# EAGLE board mono main V2-5 (EAGLE 7.4.0)
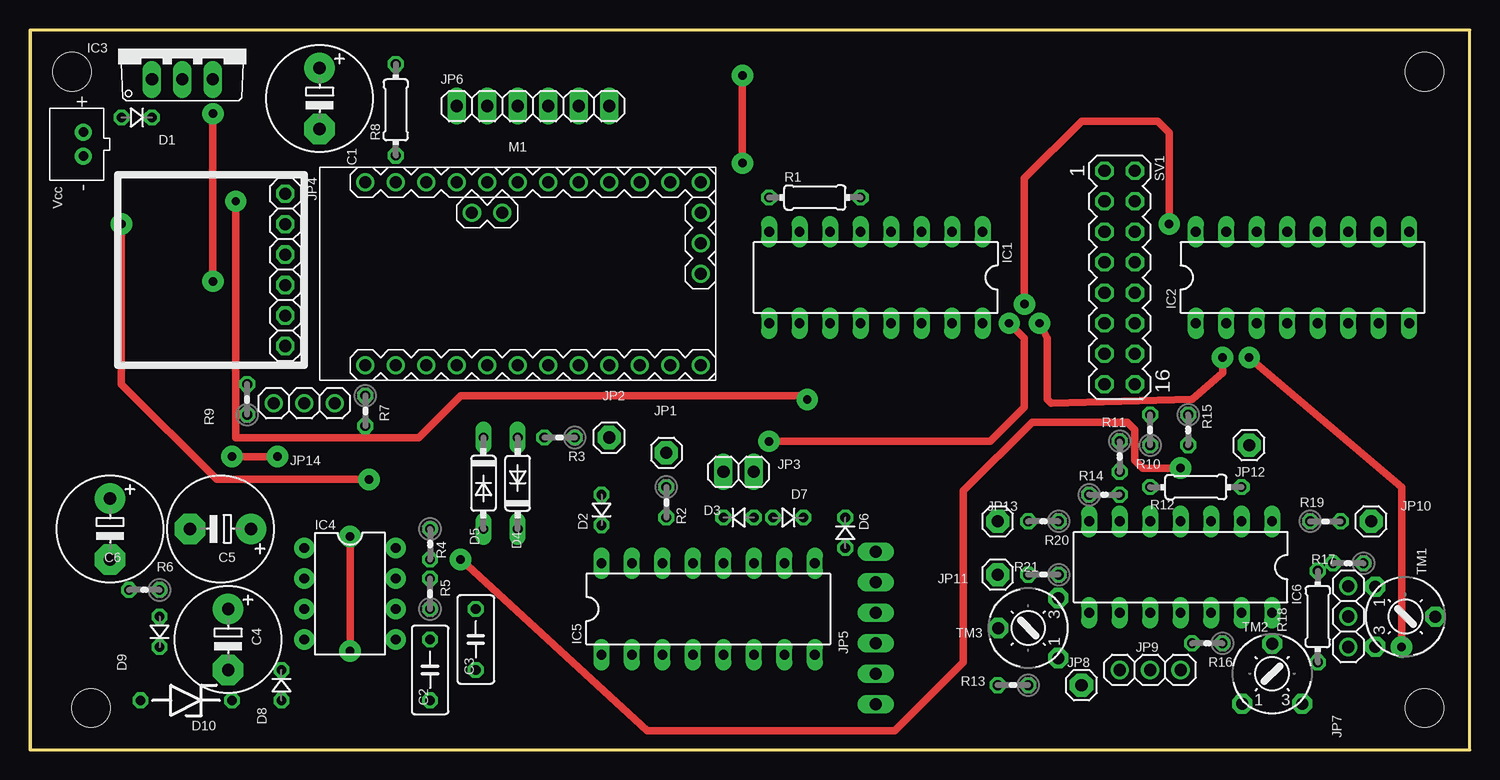
[diagram p0: board, top side]
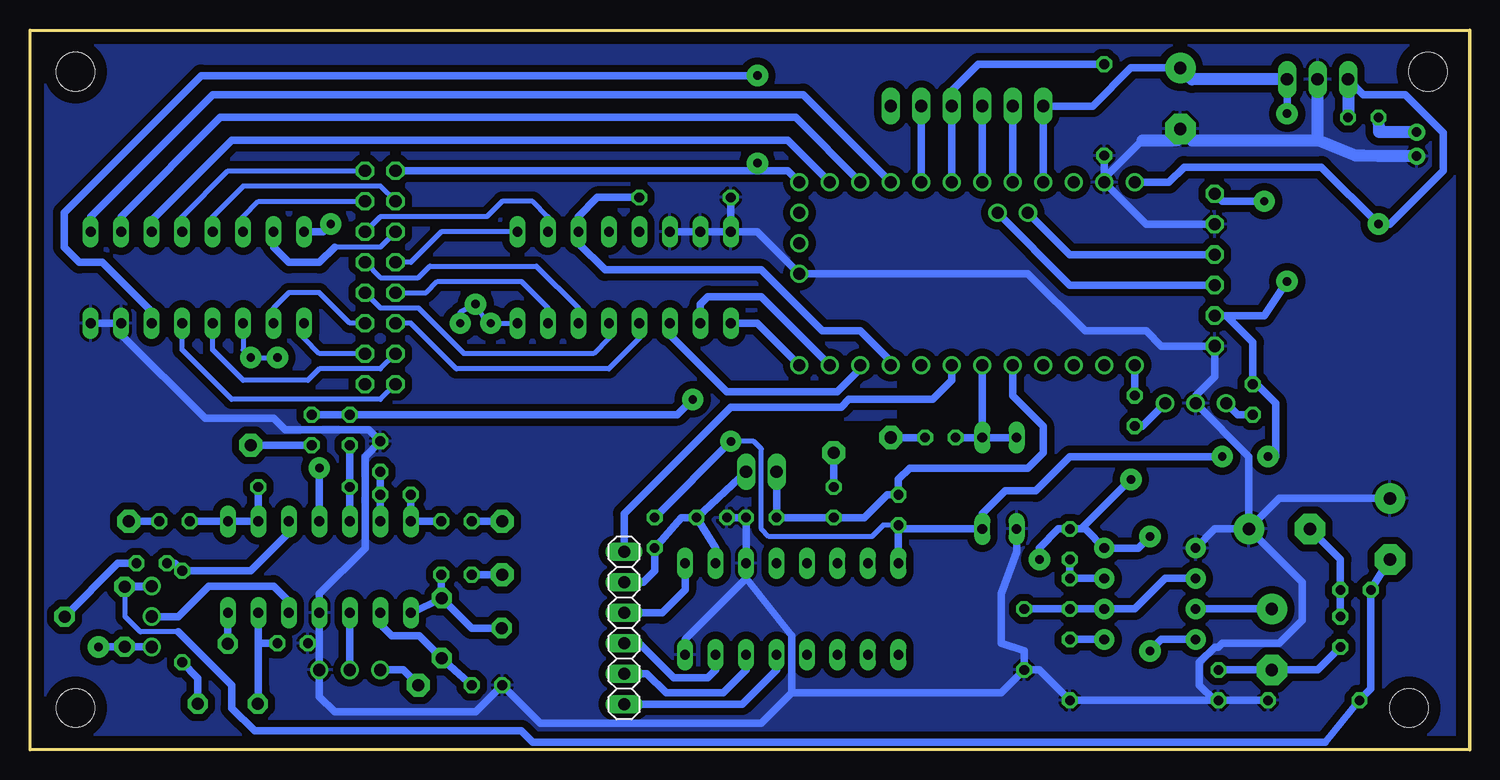
[diagram p1: board, bottom side, seen from below]

Size 120 x 59.99 mm. Coordinates in mm from the lower left corner, seen from the top.
Outline: 0,0 120,0 120,59.99 0,59.99 0,0
Copper layers (1*16): Top 0.035mm / dielectric 1.5mm / Bottom 0.035mm
Design rules "default": minimum track width 10mil, minimum drill 24mil, track to track 8mil, track to pad 8mil, pad to pad 8mil, via to via 8mil, smd to smd 8mil, copper to edge 40mil, drill to drill 8mil, minimum pad ring 10mil, minimum via ring 8mil, stop-mask expansion 4mil, vias tented up to drill 0mil, thermal gap 10mil
Holes 3.2 mm at 3.49,56.52 5.08,3.49 116.2,56.52 116.2,3.49

## Footprints (pad centres in the part's own frame; a part is rotated, then mirrored left to right if it is on the bottom)
E5-8,5 = drill 1.016 pad 2.54: + -2.54,0 | drill 1.016 pad 2.54 octagon: - 2.54,0
C050-030X075 = drill 0.813 octagon: 1 -2.54,0; 2 2.54,0
JST-PH-2-THM = drill 0.8 pad 1.422: 1 1,0; 2 -1,0
D-2.5 = drill 0.813 octagon: A 1.27,0; C -1.27,0
DO35-7 = drill 0.813 long: A 3.81,0; C -3.81,0
ZDIO-7.5 = drill 0.813 octagon: A 3.81,0; C -3.81,0
DIL16 = drill 0.813 long: 1 -8.89,-3.81; 2 -6.35,-3.81; 3 -3.81,-3.81; 4 -1.27,-3.81; 5 1.27,-3.81; 6 3.81,-3.81; 7 6.35,-3.81; 8 8.89,-3.81; 9 8.89,3.81; 10 6.35,3.81; 11 3.81,3.81; 12 1.27,3.81; 13 -1.27,3.81; 14 -3.81,3.81; 15 -6.35,3.81; 16 -8.89,3.81
TO220V = drill 1.016 long: 1 -2.54,-2.54; 2 0,-2.54; 3 2.54,-2.54
DIL08-ROUND = drill 0.813 pad 1.676: 1 -3.81,-3.81; 2 -1.27,-3.81; 3 1.27,-3.81; 4 3.81,-3.81; 5 3.81,3.81; 6 1.27,3.81; 7 -1.27,3.81; 8 -3.81,3.81
DIL14 = drill 0.813 long: 1 -7.62,-3.81; 2 -5.08,-3.81; 3 -2.54,-3.81; 4 0,-3.81; 5 2.54,-3.81; 6 5.08,-3.81; 7 7.62,-3.81; 8 7.62,3.81; 9 5.08,3.81; 10 2.54,3.81; 11 0,3.81; 12 -2.54,3.81; 13 -5.08,3.81; 14 -7.62,3.81
1X01 = drill 1.016 pad 1.93 octagon: 1 0,0
1X02 = drill 1.016 long: 1 -1.27,0; 2 1.27,0
1X06 = drill 1.016 octagon: 1 -6.35,0; 2 -3.81,0; 3 -1.27,0; 4 1.27,0; 5 3.81,0; 6 6.35,0
1X06' = drill 1.016 long: 1 -6.35,0; 2 -3.81,0; 3 -1.27,0; 4 1.27,0; 5 3.81,0; 6 6.35,0
1X03 = drill 1.016: 1 -2.54,0; 2 0,0; 3 2.54,0
ARDUINO-PRO-MINI#NP = drill 1: J2.1 -1.27,5.08; J2.2 -3.81,5.08; J3.1 15.24,0; J3.2 15.24,2.54; J3.3 15.24,5.08; J6.1 -12.7,7.62; J6.2 -10.16,7.62; J6.3 -7.62,7.62; J6.4 -5.08,7.62; J6.5 -2.54,7.62; J6.6 0,7.62; J6.7 2.54,7.62; J6.8 5.08,7.62; J6.9 7.62,7.62; J6.10 10.16,7.62; J6.11 12.7,7.62; J6.12 15.24,7.62; J7.1 15.24,-7.62; J7.2 12.7,-7.62; J7.3 10.16,-7.62; J7.4 7.62,-7.62; J7.5 5.08,-7.62; J7.6 2.54,-7.62; J7.7 0,-7.62; J7.8 -2.54,-7.62; J7.9 -5.08,-7.62; J7.10 -7.62,-7.62; J7.11 -10.16,-7.62; J7.12 -12.7,-7.62
0204/7 = drill 0.813 octagon: 1 -3.81,0; 2 3.81,0
0204V = drill 0.813 octagon: 1 -1.27,0; 2 1.27,0
MA08-2 = drill 1.016 octagon: 1 -8.89,-1.27; 2 -8.89,1.27; 3 -6.35,-1.27; 4 -6.35,1.27; 5 -3.81,-1.27; 6 -3.81,1.27; 7 -1.27,-1.27; 8 -1.27,1.27; 9 1.27,-1.27; 10 1.27,1.27; 11 3.81,-1.27; 12 3.81,1.27; 13 6.35,-1.27; 14 6.35,1.27; 15 8.89,-1.27; 16 8.89,1.27
6MM = drill 1 pad 1.676 octagon: A -2.5,-2.5; E 2.5,-2.5; S 0,2.5

## Placement (x,y rotation side)
C1  [E5-8,5]  24.13,54.29 270 top
C2  [C050-030X075]  33.34,6.67 270 top
C3  [C050-030X075]  37.15,9.21 270 top
C4  47u  [E5-8,5]  16.51,9.21 270 top
C5  47  [E5-8,5]  15.88,18.41 180 top
C6  [E5-8,5]  6.67,18.41 270 top
CN1  Vcc  [JST-PH-2-THM]  4.45,50.48 90 top
D1  4148  [D-2.5]  8.89,52.7 180 top
D2  1N4148  [D-2.5]  47.62,20 90 top
D3  1N4148  [D-2.5]  59.05,19.37 0 top
D4  1N4148  [DO35-7]  40.64,22.23 90 top
D5  1N4148  [DO35-7]  37.78,22.23 270 top
D6  1N4148  [D-2.5]  67.94,18.1 270 top
D7  1N4148  [D-2.5]  63.18,19.37 180 top
D8  4148  [D-2.5]  20.95,5.4 270 top
D9  1N4148  [D-2.5]  10.79,9.84 90 top
D10  [ZDIO-7.5]  13.02,4.13 180 top
IC1  4051N  [DIL16]  70.48,39.37 180 top
IC2  4051N  [DIL16]  106.05,39.37 0 top
IC3  7805  [TO220V]  12.7,58.42 0 top
IC4  NE555N  [DIL08-ROUND]  26.67,13.02 270 top
IC5  4040N  [DIL16]  56.52,11.75 0 top
IC6  TL084P  [DIL14]  95.89,15.24 180 top
JP1  CK_O  [1X01]  53.02,24.77 0 top
JP2  GATE  [1X01]  48.26,26.04 90 top
JP3  CK_OUT  [1X02]  59.05,23.18 180 top
JP4  DAC  [1X06]  21.27,40.01 270 top
JP5  CK_ division_rotor  [1X06']  70.48,10.16 270 bottom
JP6  [1X06']  41.91,53.66 0 top
JP7  pitch_bend  [1X03]  109.86,11.11 270 top
JP8  Exp_IN  [1X01]  87.63,5.4 180 top
JP9  expression  [1X03]  93.34,6.67 180 top
JP10  Bend  [1X01]  111.76,19.05 180 top
JP11  Exp_out  [1X01]  80.64,14.61 180 top
JP12  CV  [1X01]  101.6,25.4 180 top
JP13  CV_Bend  [1X01]  80.64,19.05 180 top
JP14  MIDI_PORT  [1X03]  22.86,28.89 180 top
M1  ARDUINO-PRO-MINI-5.0V  [ARDUINO-PRO-MINI#NP]  40.64,39.69 0 top
R1  10k  [0204/7]  65.41,46.04 0 top
R2  330  [0204V]  53.02,20.64 270 top
R3  300  [0204V]  44.13,26.04 180 top
R4  10k  [0204V]  33.34,17.14 270 top
R5  10k  [0204V]  33.34,13.02 90 top
R6  470  [0204V]  9.53,13.34 180 top
R7  330  [0204V]  27.94,28.26 270 top
R8  1k  [0204/7]  30.48,53.34 90 top
R9  330  [0204V]  18.1,29.21 90 top
R10  10k  [0204V]  93.34,26.67 90 top
R11  10k  [0204V]  90.81,24.45 270 top
R12  10k  [0204/7]  97.16,21.91 0 top
R13  10k  [0204V]  81.92,5.4 180 top
R14  10k  [0204V]  89.53,21.27 0 top
R15  100  [0204V]  96.52,26.67 270 top
R16  10k  [0204V]  98.11,8.89 180 top
R17  47k  [0204V]  109.86,15.56 180 top
R18  47k  [0204/7]  107.31,11.11 90 top
R19  100  [0204V]  107.95,19.05 0 top
R20  100  [0204V]  84.45,19.05 180 top
R21  100  [0204V]  84.45,14.61 180 top
SV1  keyboard connector  [MA08-2]  90.81,39.37 270 top
TM1  10k-BEND_OFF  [6MM]  114.62,11.11 270 top
TM2  50k-B_GAIN  [6MM]  103.5,6.35 0 top
TM3  50k-EXP_GAIN  [6MM]  83.19,10.16 90 top

## Library data of the parts
C1-C6 R1-R11 R13-R21 = rcl
CN1 IC4 JP1 JP2 JP4 JP7-JP14 TM1-TM3 = adafruit
D1-D10 = diode
IC1 IC2 IC5 = 40xx
IC3 IC6 = linear
JP3 JP5 JP6 = pinhead
M1 = diy-modules
R12 = eagle-ltspice; SPICEMODEL: NONE; SPICEPREFIX: R
SV1 = con-lstb; OC_FARNELL: unknown; OC_NEWARK: unknown

## Nets
-3V: C6.- D10.A JP7.1 R6.2 TM1.A
AGND: C1.- C2.2 C3.2 C5.+ C6.+ CN1.2 D3.A D5.A D7.A D8.A D10.C IC1.6 IC1.7 IC1.8 IC2.7 IC2.8 IC3.2 IC4.1 IC5.8 IC5.11 IC6.11 JP4.2 JP4.6 JP9.1 JP14.2 M1.J6.2 R1.1 R8.1 R11.1 R13.2 R16.2
ARP_ENABLE: JP6.4 M1.J6.7 R8.2
ARP_MODE: JP6.5 M1.J6.8
CK_I: JP5.1 M1.J7.6
CK_O: D2.A D3.C JP3.2 M1.J7.8 R2.2
CK_RATE: JP6.3 M1.J6.6
CV: JP4.1 R10.2 R15.1
GATE: D4.A D5.C M1.J7.7 R3.2
GND: JP6.6
GND.1: M1.J7.9
MIDI_O: M1.J7.12 R7.1
N$1: IC6.14 TM2.S
N$2: R17.1 TM1.S
N$3: R18.1 TM2.E
N$4: IC6.3 R17.2 R18.2
N$5: IC6.1 IC6.2 R12.2 R19.1
N$6: JP10.1 R19.2
N$7: JP13.1 R20.2
N$8: JP11.1 R21.2
N$15: JP12.1 R15.2
N$16: JP1.1 R2.1
N$22: IC5.9 JP5.3
N$23: IC5.7 JP5.4
N$24: IC5.6 JP5.5
N$25: IC5.5 JP5.6
N$26: D6.A D7.C IC5.10 JP3.1 JP5.2
N$28: JP2.1 R3.1
N$30: JP14.1 R7.2
N$31: JP14.3 R9.1
N$33: IC6.9 R13.1 TM3.A
N$40: IC4.7 R4.2 R5.2
N$41: C3.1 IC4.2 IC4.6 R5.1
N$42: C2.1 IC4.5
N$44: C4.+ IC4.3
N$45: C4.- D8.C D9.C
N$46: C5.- D9.A R6.1
N$48: IC6.12 JP7.2
N$49: IC6.13 R16.1 TM2.A
N$51: IC6.10 JP9.2
N$52: IC6.8 R21.1 TM3.E TM3.S
N$53: CN1.1 D1.A
N$55: IC6.6 R11.2 R14.2
N$56: IC6.7 R14.1 R20.1
N$60: IC6.5 R10.1 R12.1
N$61: JP8.1 JP9.3
NC: SV1.16
OCT_SEL: JP6.2 M1.J6.5
R1: IC1.2 SV1.6
R2: IC1.1 SV1.7
R3: IC1.14 SV1.8
R4: IC1.15 SV1.9
R5: IC1.13 SV1.10
R6: IC1.12 SV1.11
R_MUX: IC1.3 M1.J7.4 R1.2
R_MUX_A: IC1.11 M1.J7.3
R_MUX_B: IC1.10 M1.J7.2
R_MUX_C: IC1.9 M1.J7.1
SCK: JP4.3 M1.J2.2
SDA: JP4.4 M1.J2.1
VCC: C1.+ D2.C D4.C D6.C IC1.16 IC2.3 IC2.16 IC3.3 IC5.16 JP4.5 JP6.1 JP7.3 M1.J6.4 R9.2 TM1.E
VCC_RAW: D1.C IC3.1 IC4.4 IC4.8 IC6.4 M1.J6.1 R4.1
W1: IC2.6 M1.J6.12 SV1.1
W2: IC2.12 SV1.2
W3: IC2.13 SV1.3
W4: IC2.14 SV1.4
W5: IC2.15 SV1.5
W6: IC2.2 SV1.12
W7: IC2.4 SV1.13
W8: IC2.1 SV1.14
W9: IC2.5 SV1.15
W_MUX: M1.J7.5
W_MUX_A: IC2.11 M1.J6.11
W_MUX_B: IC2.10 M1.J6.10
W_MUX_C: IC2.9 M1.J6.9

## Tracks (layer width: path | path; a pad name or v marks a point on that pad's centre or on a via)
-3V
  Bottom 0.406: 107.63,9.84 110.81,9.84 112.08,11.11 112.08,13.57
  Bottom 0.61: C6.- R6.2 8.26,5.08 D10.A 12.06,0.64 78.11,0.64 79.06,1.59 101.28,1.59 103.19,3.49 103.19,5.4 107.63,9.84 | 112.39,13.65 JP7.1 109.89,13.61 TM1.A 112.08,13.57
AGND
  Bottom 0.61: IC2.8 IC2.7 112.39,34.61 105.41,27.62 99.69,27.62 98.74,26.67 91.76,26.67 R11.1 92.08,24.45 92.08,16.83 95.89,13.02 IC6.11 95.89,8.89 | IC1.6 IC1.7 IC1.8 | C3.2 35.88,6.67 C2.2 D8.A | IC1.8 59.37,43.18 55.88,39.69 36.83,39.69 32.07,34.92 26.99,34.92 25.72,33.66 JP4.6 21.27,31.11 22.86,29.53 JP14.2 18.41,24.45 C5.+ | M1.J6.2 30.48,47.62 27.3,50.8 | M1.J6.2 26.99,43.81 JP4.2 | R1.1 IC1.8 | D7.A D3.A IC5.11 60.33,14.29 | 95.89,8.89 JP9.1 95.89,4.45 94.61,3.17 82.87,3.17 R13.2 77.47,2.22 59.05,2.22 56.52,4.76 | 95.89,8.89 R16.2 | R8.1 M1.J6.2 | D10.C D8.A | C3.2 39.05,4.76 56.52,4.76 | C3.2 37.15,8.26 39.05,8.89 39.05,13.02 37.78,16.51 D5.A | 60.33,14.29 65.41,9.21 IC5.8 | 56.52,4.76 56.52,9.53 60.33,14.29 | C6.+ 15.88,20.95 C5.+ | C5.+ 21.27,18.41 IC4.1 | D8.A 21.27,4.13 22.54,5.4 22.54,7.3 21.27,8.57 20.95,8.57 20.64,8.89 15.88,8.89 13.97,10.79 13.97,13.97 C5.+
  Bottom 1.016: CN1.2 7.67,49.48 8.89,49.53 9.53,49.53 12.7,50.8 | 12.7,50.8 IC3.2 | 12.7,50.8 23.18,50.8 C1.- 24.13,51.12 24.45,50.8 27.3,50.8
  pour Bottom (isolate 0.61): 0,60.01 120.02,60.01 120.02,0 0,0
ARP_ENABLE
  Bottom 0.61: M1.J6.7 JP6.4 43.18,54.93 40.96,57.15 R8.2
ARP_MODE
  Bottom 0.61: JP6.5 M1.J6.8
CK_I
  Bottom 0.61: M1.J7.6 43.18,30.8 44.77,29.21 51.75,29.21 52.39,28.57 61.59,28.57 70.48,19.68 JP5.1
CK_O
  Bottom 0.61: JP3.2 D3.C R2.2 50.48,19.37 48.58,21.27 D2.A 47.62,22.54 46.67,23.5 36.83,23.5 35.56,24.77 35.56,26.99 38.1,29.53 M1.J7.8
CK_RATE
  Bottom 0.61: M1.J6.6 JP6.3
CV  (via drill 0.7 pad 1.78)
  Top 0.61: v64.77,29.21 64.45,29.53 35.88,29.53 32.38,26.04 17.14,26.04 v17.14,45.72
  Bottom 0.61: R15.1 R10.2 66.04,27.94 v64.77,29.21 | v17.14,45.72 20.64,45.72 JP4.1
GATE
  Bottom 0.61: D5.C D4.A | R3.2 D4.A | D4.A M1.J7.7
MIDI_O
  Bottom 0.61: M1.J7.12 R7.1
N$1
  Bottom 0.61: TM2.S IC6.14
N$2
  Bottom 0.61: TM1.S 112.67,15.56 R17.1
N$3
  Bottom 0.61: TM2.E 106,5.99 R18.1
N$4
  Bottom 0.61: IC6.3 98.42,18.1 101.6,14.92 R18.2 107.95,15.56 R17.2
N$5
  Bottom 0.61: R12.2 IC6.2 IC6.1 R19.1
N$6
  Bottom 0.61: JP10.1 R19.2
N$7
  Bottom 0.61: R20.2 JP13.1
N$8
  Bottom 0.61: R21.2 JP11.1
N$15
  Bottom 0.61: JP12.1 R15.2
N$16
  Bottom 0.61: R2.1 JP1.1
N$22
  Bottom 0.61: IC5.9 65.41,13.34 67.31,11.43 JP5.3
N$23
  Bottom 0.61: IC5.7 62.87,6.67 63.5,6.03 66.36,6.03 69.22,8.89 JP5.4
N$24
  Bottom 0.61: JP5.5 68.58,6.35 66.99,4.76 62.23,4.76 60.33,6.67 IC5.6
N$25
  Bottom 0.61: IC5.5 57.78,6.67 60.64,3.81 JP5.6
N$26
  Bottom 0.61: IC5.10 62.87,16.83 D7.C | D7.C 65.72,19.37 D6.A 67.94,14.92 68.9,13.97 JP5.2 | JP3.1 D7.C
N$28
  Bottom 0.61: R3.1 JP2.1
N$30
  Bottom 0.61: R7.2 27.3,26.99 JP14.1
N$31
  Bottom 0.61: JP14.3 19.37,27.94 R9.1
N$33
  Bottom 0.61: R13.1 85.69,7.58 TM3.A 87.55,9.53 89.85,9.53 90.81,10.48 IC6.9
N$40
  Bottom 0.61: R4.2 R5.2 IC4.7
N$41
  Bottom 0.61: IC4.2 25.4,14.29 27.94,11.75 IC4.6 R5.1 C3.1
N$42
  Bottom 0.61: C2.1 IC4.5
N$44
  Bottom 0.61: C4.+ IC4.3
N$45
  Bottom 0.61: D8.C C4.- 12.7,6.67 D9.C
N$46
  Bottom 0.61: D9.A R6.1 10.79,15.88 C5.-
N$48
  Bottom 0.61: JP7.2 107.63,11.11 105.09,13.65 99.69,13.65 98.42,12.38 IC6.12
N$49
  Bottom 0.61: TM2.A 100.97,5.16 100.97,8.89 | 100.97,8.89 IC6.13 | R16.1 100.97,8.89
N$51
  Bottom 0.61: JP9.2 IC6.10
N$52
  Bottom 0.61: TM3.E 88.22,11.39 IC6.8 | R21.1 85.72,12.7 TM3.E | TM3.S 83.19,10.16 TM3.E
N$53
  Bottom 1.016: CN1.1 7.57,51.48 D1.A
N$55
  Bottom 0.61: IC6.6 R14.2 R11.2
N$56
  Bottom 0.61: R14.1 IC6.7 R20.1
N$60
  Bottom 0.61: R10.1 R12.1 IC6.5
N$61
  Bottom 0.61: JP9.3 88.9,6.67 JP8.1
OCT_SEL
  Bottom 0.61: JP6.2 M1.J6.5
R1
  Bottom 0.406: SV1.6 90.81,44.45 81.92,44.45 80.64,45.72 78.11,45.72 76.83,44.45 IC1.2
R2
  Bottom 0.406: IC1.1 85.72,43.18 88.27,40.64 SV1.7
R3
  Bottom 0.406: SV1.8 90.81,39.37 87.63,39.37 86.68,40.32 77.79,40.32 74.3,36.83 IC1.14
R4
  Bottom 0.406: SV1.9 87,38.1 86.04,39.05 79.06,39.05 76.83,36.83 IC1.15
R5
  Bottom 0.406: SV1.10 90.81,36.83 87.63,36.83 83.82,33.02 73.03,33.02 71.75,34.29 IC1.13
R6
  Bottom 0.406: IC1.12 69.22,34.29 71.75,31.75 84.45,31.75 88.27,35.56 SV1.11
R_MUX
  Bottom 0.61: R1.2 72.71,46.04 74.3,44.45 IC1.3 74.3,42.23 72.07,40.01 59.05,40.01 53.98,34.92 50.8,34.92 48.26,32.38 M1.J7.4
R_MUX_A
  Bottom 0.61: M1.J7.3 50.8,31.75 52.7,29.84 61.91,29.84 66.67,34.61 IC1.11
R_MUX_B
  Bottom 0.61: IC1.10 64.14,37.15 63.5,37.78 59.05,37.78 M1.J7.2
R_MUX_C
  Bottom 0.61: IC1.9 59.37,35.56 M1.J7.1
S$1
  pour Bottom (isolate 0.61): 47.94,58.42 116.84,58.42 116.84,27.62 47.94,27.62
SCK
  Bottom 0.61: JP4.3 33.34,41.27 M1.J2.2
SDA
  Bottom 0.61: JP4.4 33.34,38.73 M1.J2.1 39.69,45.09
VCC  (via drill 0.7 pad 1.78)
  Top 0.61: v15.24,39.05 v15.24,53.02 | v16.83,24.45 v20.64,24.45 | v94.93,43.81 94.93,51.44 93.98,52.39 87.63,52.39 82.87,47.62 v82.87,37.15 | v61.59,25.72 80.01,25.72 82.87,28.57 82.87,34.29 v81.6,35.56 | v99.38,32.7 99.38,31.43 96.84,29.21 85.09,28.89 84.77,29.21 84.77,34.29 v84.14,35.56 | v114.3,8.57 114.3,21.91 v101.6,32.7
  Bottom 0.406: D2.C 48.9,18.73 49.85,17.78 58.42,17.78 59.05,18.41 59.05,25.08 59.69,25.72 v61.59,25.72 | 81.92,35.56 v82.87,37.15 84.14,36.51 v84.14,35.56 | v81.6,35.56 IC1.16 | v99.38,32.7 v101.6,32.7 102.23,33.34 IC2.3
  Bottom 0.61: IC5.16 D2.C 47.31,18.41 D4.C 40.64,19.68 38.73,21.59 36.2,21.59 33.34,24.45 v20.64,24.45 | JP7.3 109.89,8.61 TM1.E 114.26,8.61 v114.3,8.57 | C1.+ 28.26,56.83 31.43,53.66 JP6.1 M1.J6.4 | v15.24,39.05 17.14,36.2 JP4.5 20.32,36.2 18.1,33.97 R9.2 17.78,30.48 16.19,28.89 16.19,24.45 v16.83,24.45 | v15.24,53.02 IC3.3 | IC2.16 95.57,43.18 v94.93,43.81 | 81.92,35.56 v81.6,35.56 | D6.C v61.59,25.72
  Bottom 1.016: IC3.3 23.18,55.88 C1.+
VCC_RAW  (via drill 0.7 pad 1.78)
  Top 0.61: v26.67,17.78 v26.67,8.26 | v28.26,22.54 15.56,22.54 7.62,30.48 v7.62,43.81 | v95.89,23.5 92.71,23.5 92.08,24.13 92.08,26.67 91.44,27.3 83.5,27.3 77.79,21.59 77.79,7.3 72.07,1.59 51.44,1.59 v35.88,15.88
  Bottom 0.61: v26.67,17.78 27.62,16.83 IC4.8 32.07,18.41 R4.1 | v26.67,8.26 25.72,9.21 IC4.4 | R4.1 32.38,18.41 v28.26,22.54 | IC6.4 v95.89,23.5 | v35.88,15.88 35.88,16.83 34.29,18.41 R4.1 | IC3.1 8.89,54.61 5.4,54.61 2.22,51.44 2.22,48.26 6.67,43.81 v7.62,43.81 12.38,48.58 23.81,48.58 25.08,47.31 M1.J6.1
  Bottom 1.016: IC3.1 D1.C
W1  (via drill 0.7 pad 1.78)
  Top 0.61: v59.37,56.2 v59.37,48.9
  Bottom 0.61: SV1.1 59.37,48.26 | v59.37,48.9 59.37,48.26 | 59.37,48.26 56.83,48.26 M1.J6.12 | IC2.6 109.86,36.51 113.98,40.64 115.89,40.64 117.16,41.91 117.16,44.77 105.73,56.2 v59.37,56.2
W2
  Bottom 0.406: IC2.12 107.31,44.45 103.5,48.26 SV1.2
W3
  Bottom 0.406: SV1.3 90.81,46.99 102.23,46.99 104.78,44.45 IC2.13
W4
  Bottom 0.406: IC2.14 102.23,44.45 100.97,45.72 SV1.4
W5
  Bottom 0.406: SV1.5 90.81,41.91 94.61,41.91
  Bottom 0.61: 94.61,41.91 95.89,40.64 98.42,40.64 99.69,41.91 IC2.15
W6
  Bottom 0.406: SV1.12 93.34,35.56 95.89,38.1 98.42,38.1 99.69,36.83 IC2.2
W7
  Bottom 0.406: SV1.13 90.81,31.75 95.89,31.75 96.84,30.8 102.23,30.8 104.78,33.34 IC2.4
W8
  Bottom 0.406: SV1.14 95.89,33.02 97.16,34.29 IC2.1
W9
  Bottom 0.406: SV1.15 90.81,29.21 103.19,29.21 107.31,33.34 IC2.5
W_MUX_A
  Bottom 0.61: IC2.11 109.86,44.13 103.19,50.8 56.83,50.8 M1.J6.11
W_MUX_B
  Bottom 0.61: IC2.10 112.39,44.45 104.14,52.7 56.2,52.7 M1.J6.10
W_MUX_C
  Bottom 0.61: IC2.9 114.94,44.45 104.78,54.61 55.56,54.61 M1.J6.9

## Text on the board
Document: MONOPHONO V2.5 | '21 | B001